# Altium PCB Widora-NEO-SEER.PcbDoc (part 1 of 2)
Units mil, origin at the board's own origin, x right, y up, seen from the top; angles counter-clockwise.
Board outline 3000 x 1400 mil, 4 copper layers (Top Layer, GND, PWR, Bottom Layer), stack 84.8 mil thick; 153 components, 144 nets, 699 pads, 452 vias.
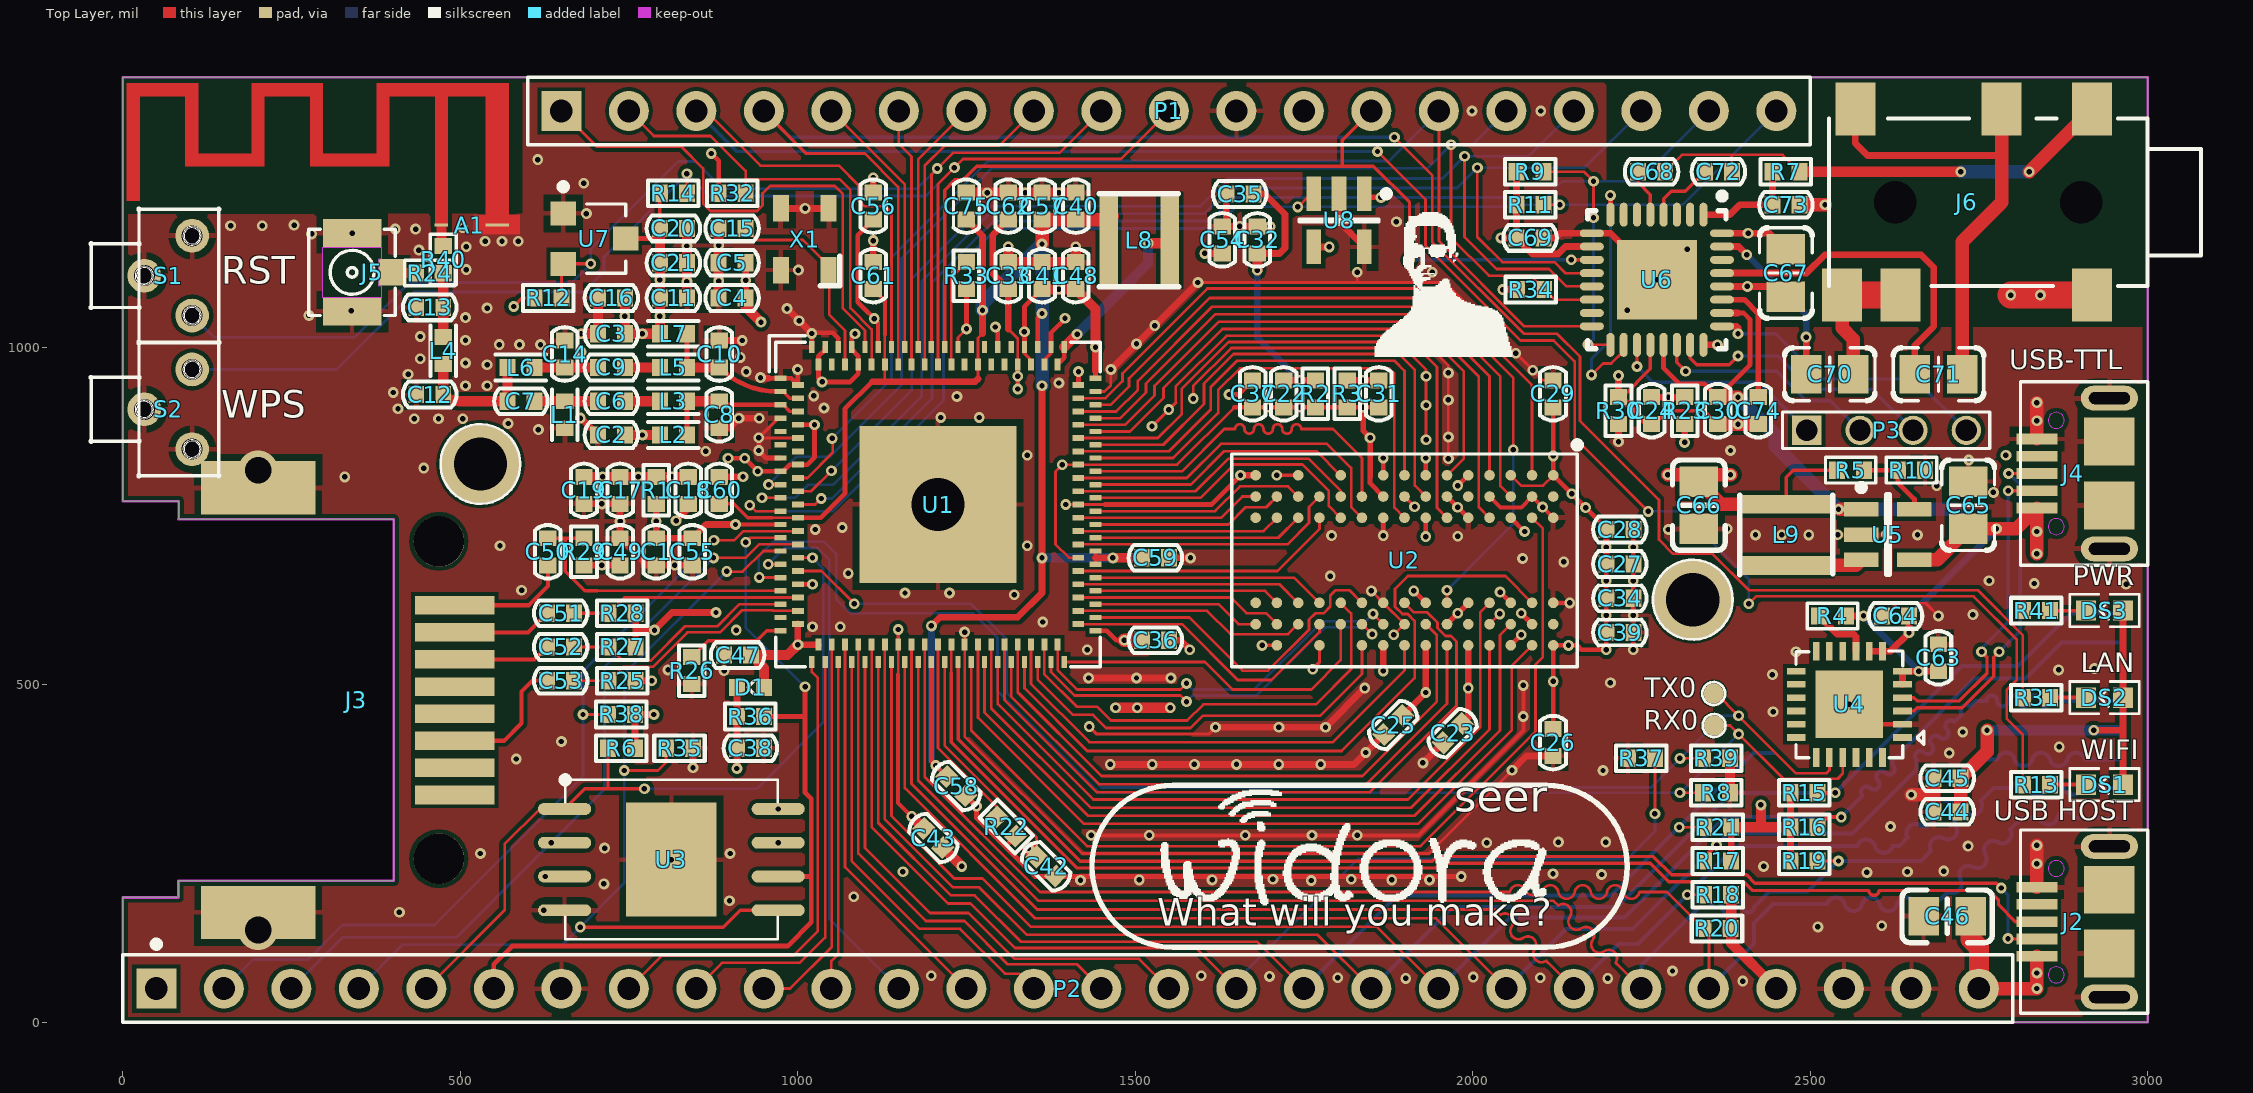
[diagram p0: Top Layer view]
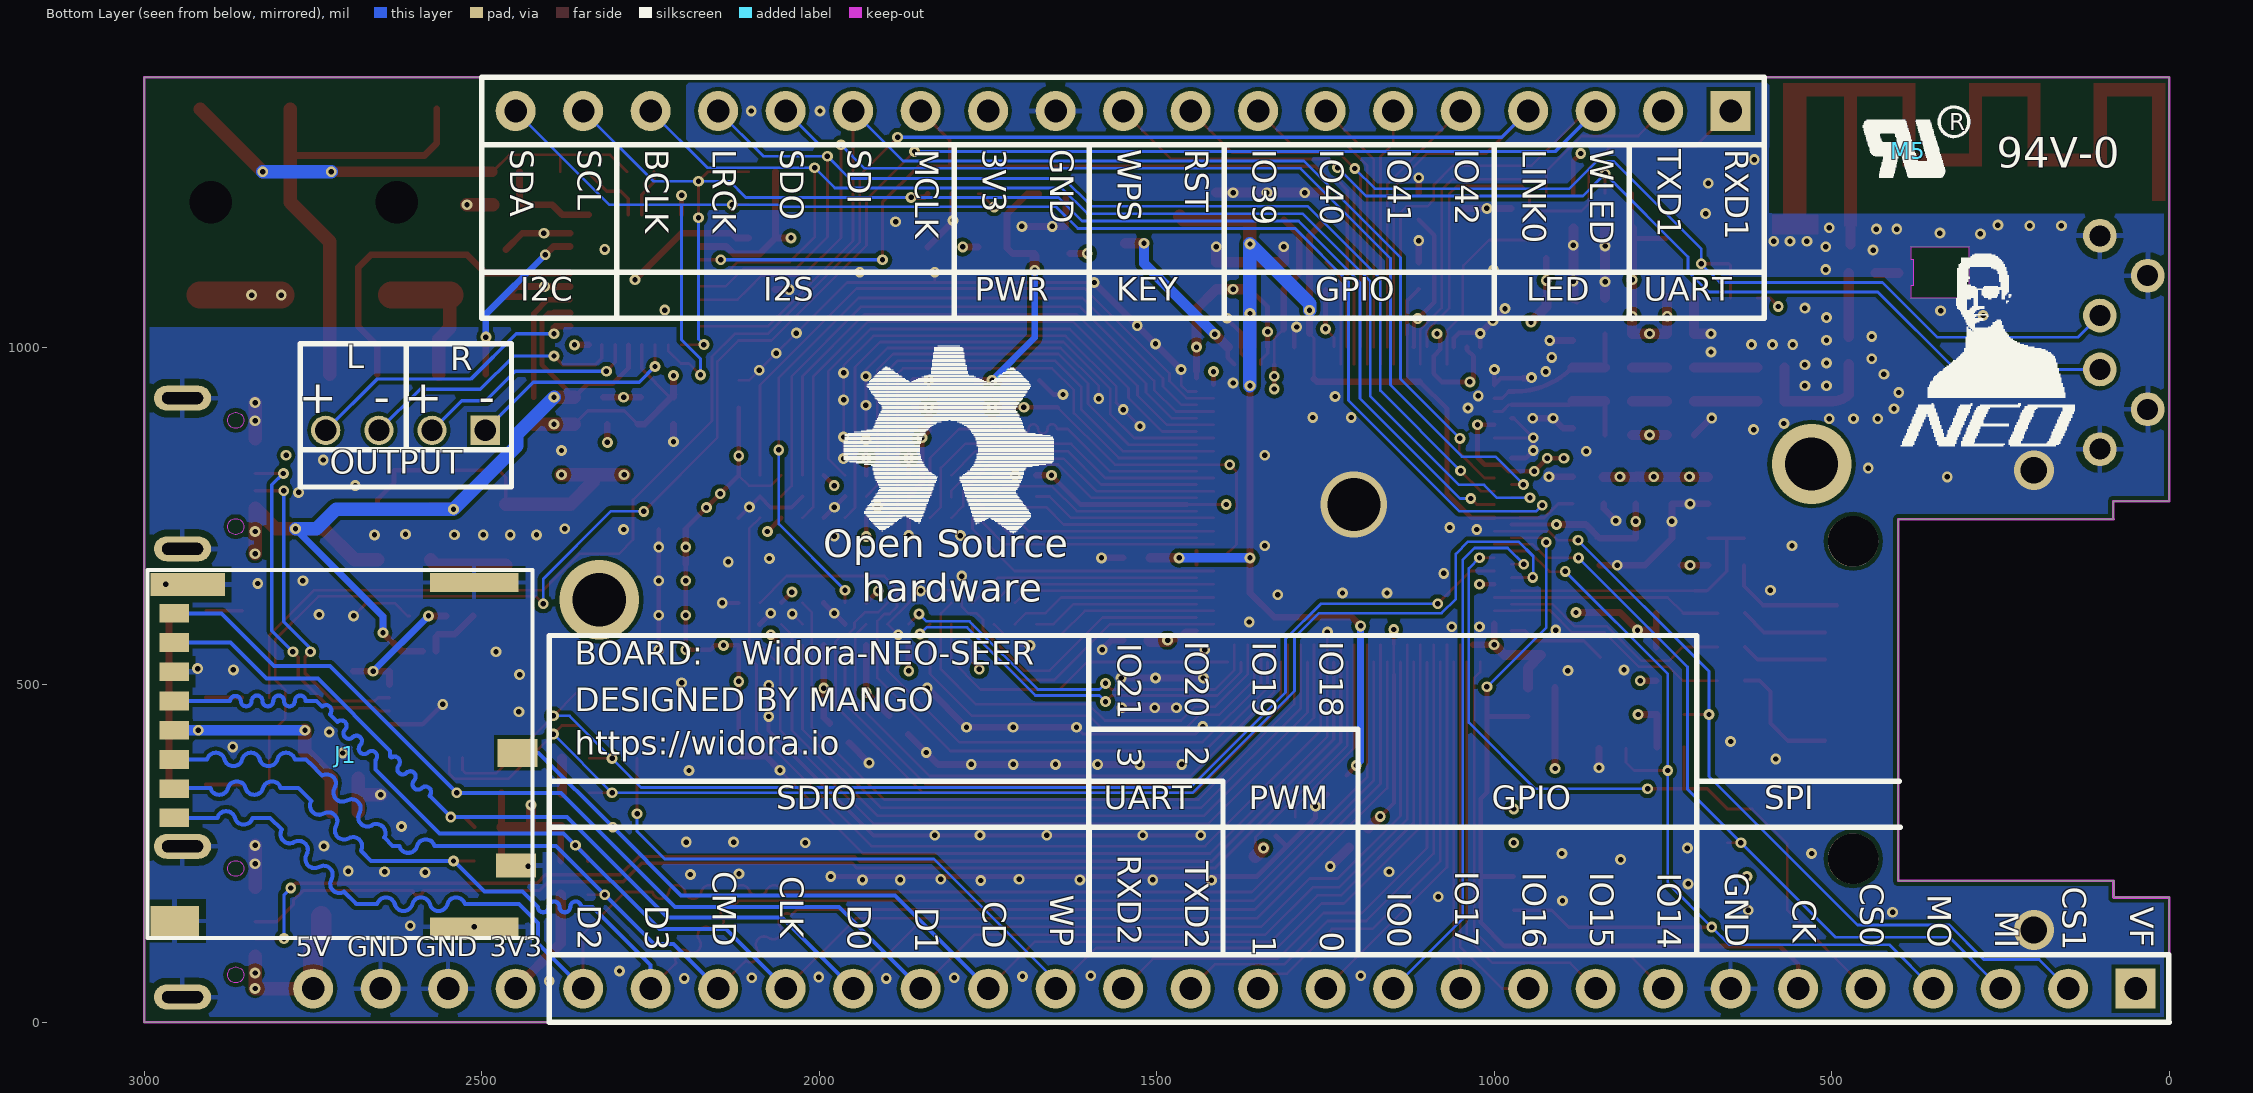
[diagram p1: Bottom Layer view, seen from below]
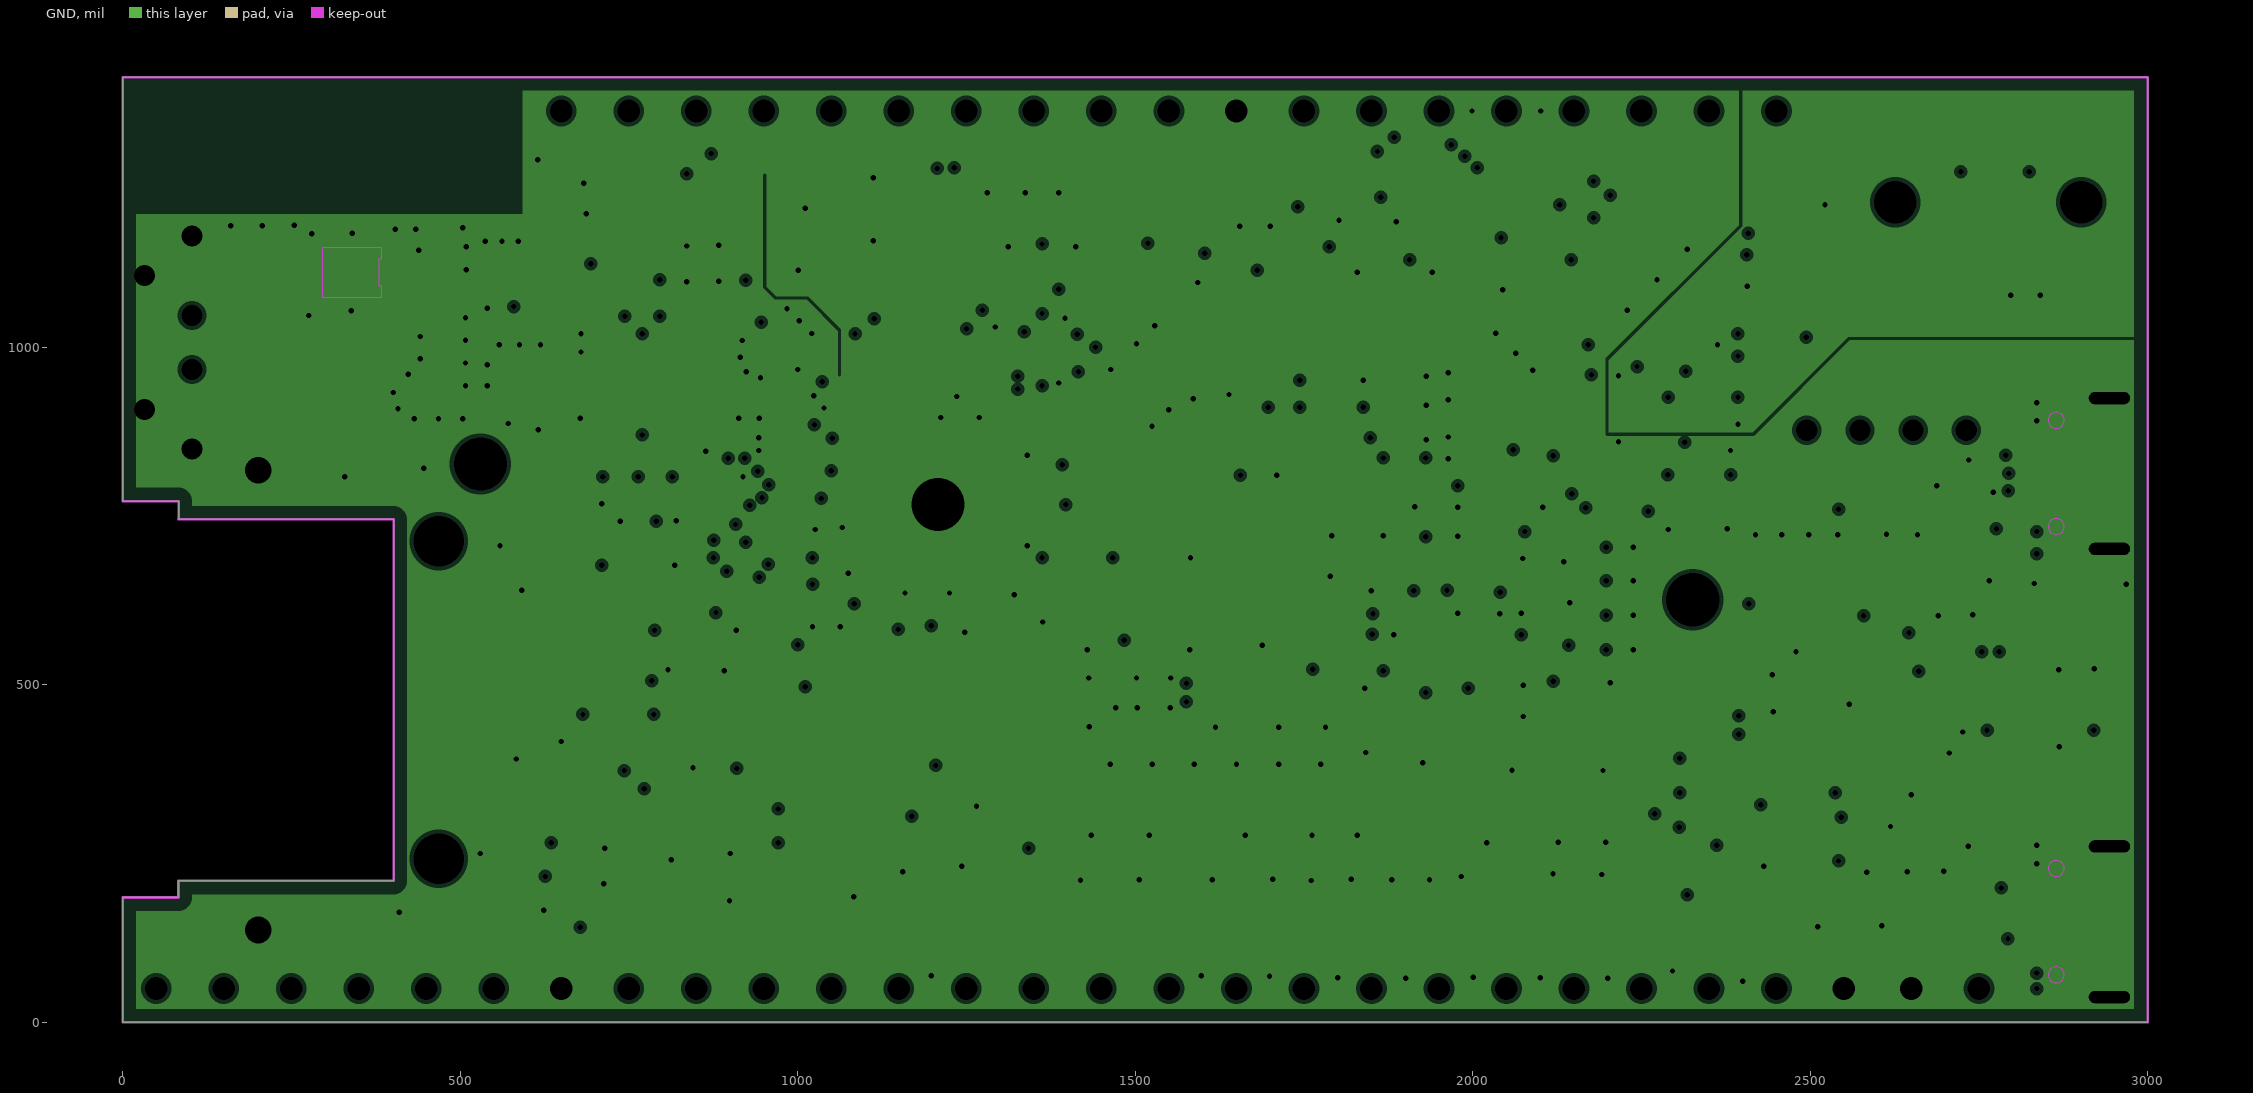
[diagram p2: GND, clearances drawn from the general rule]
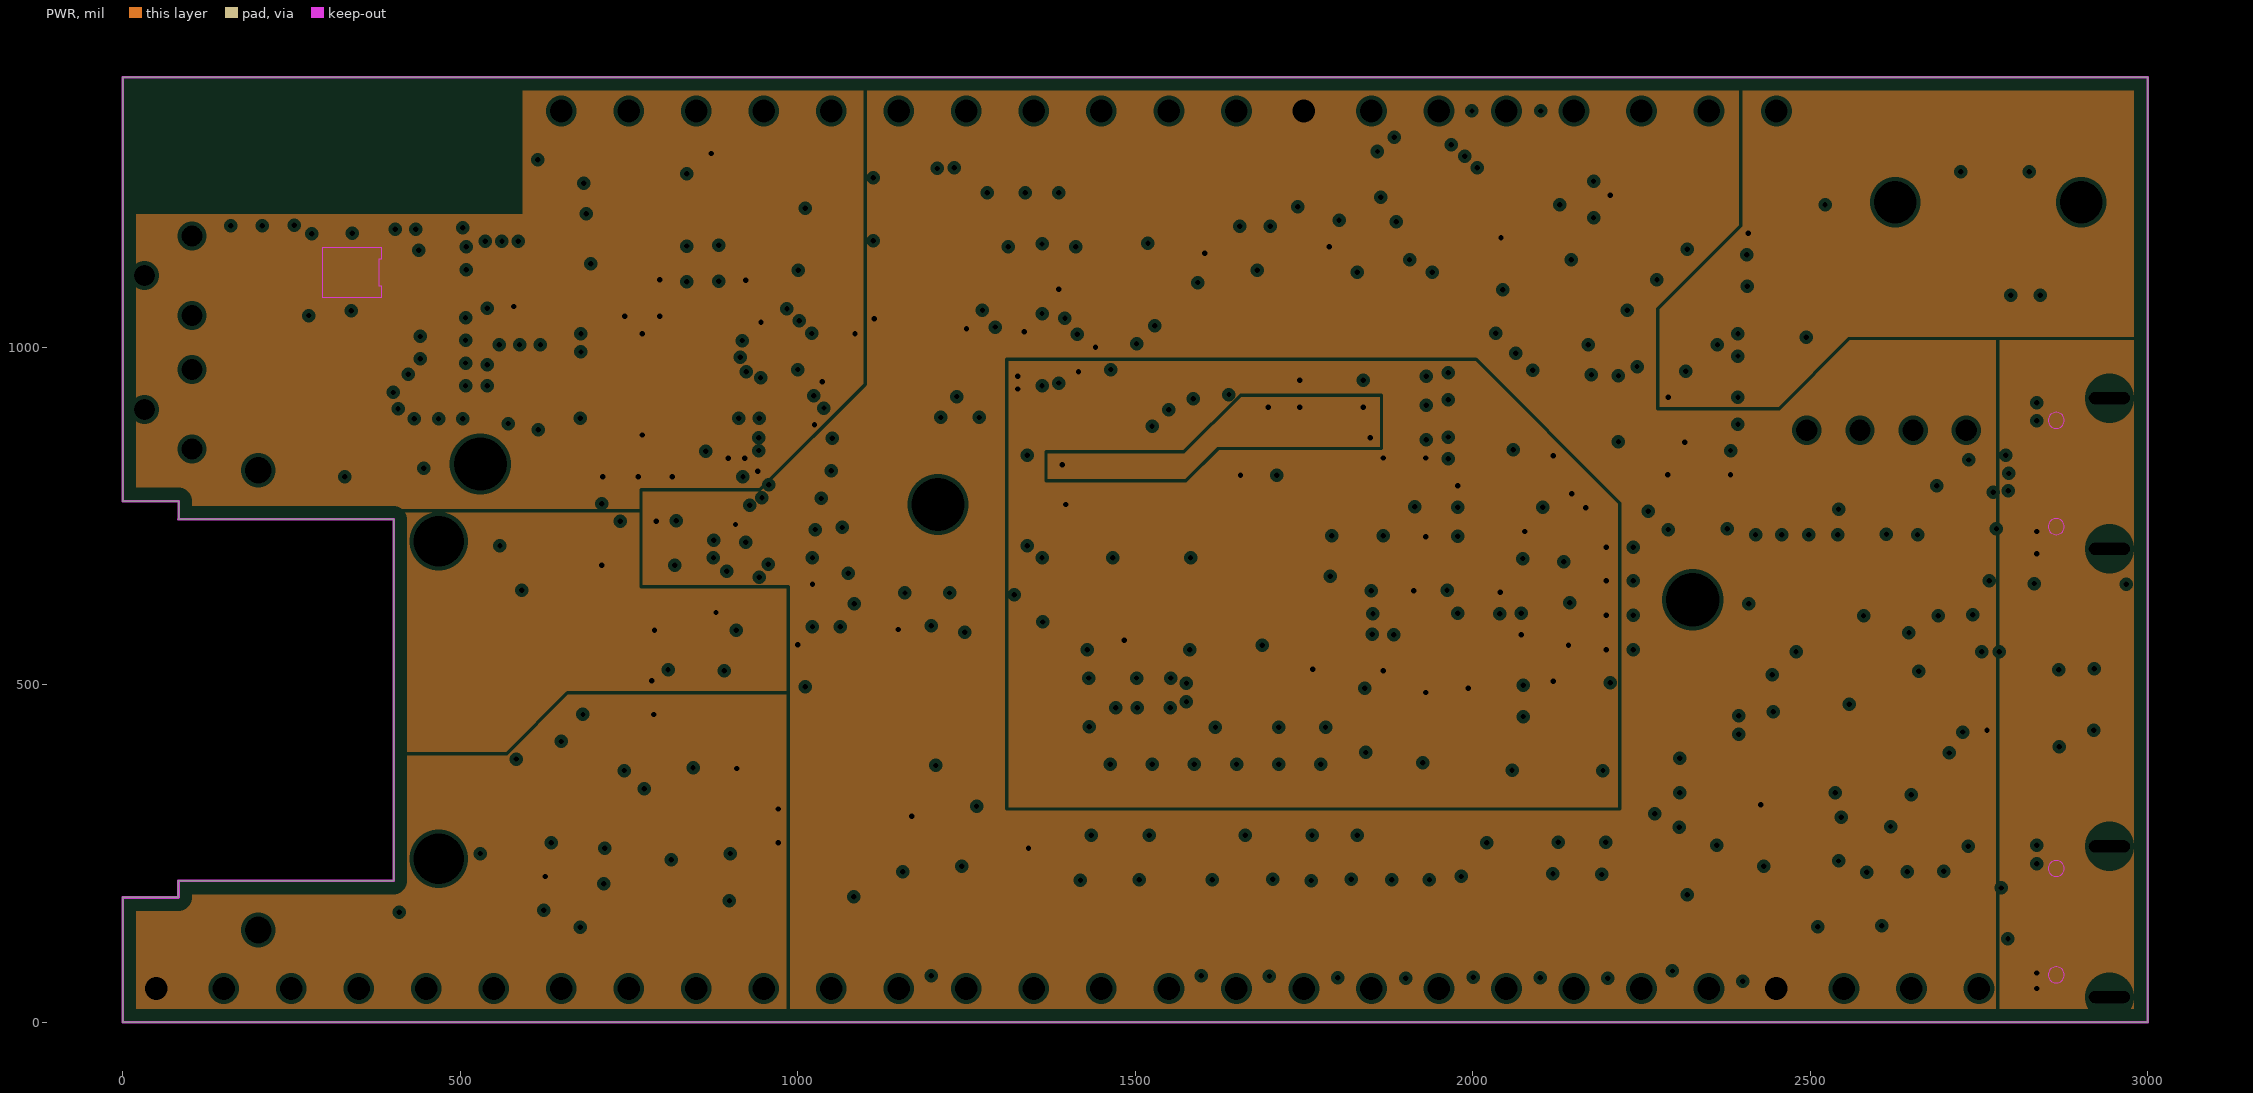
[diagram p3: PWR, clearances drawn from the general rule]
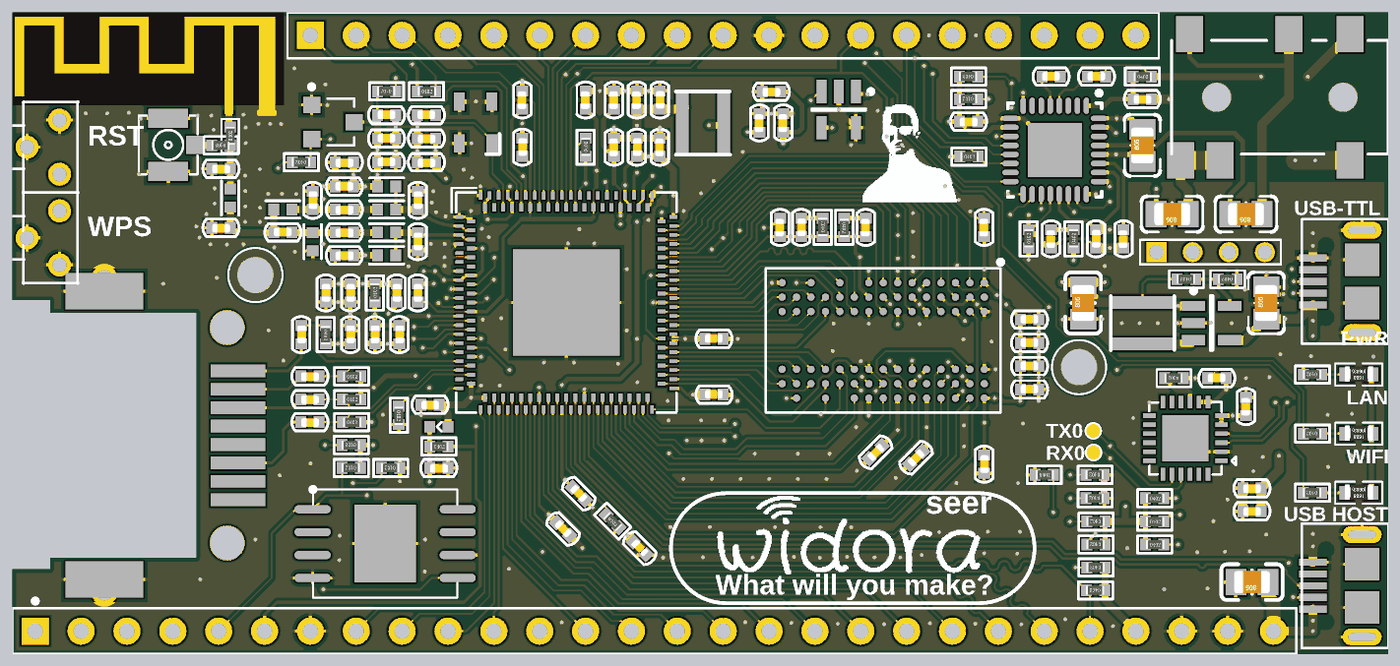
[diagram p5: 3D render of the assembled board from above, using the file's embedded part models]

## Layer stack, top to bottom
Top Solder: solder mask 0.4, Solder Resist, Dk 3.5
Top Layer: signal copper 1.4
Dielectric1: core 54, FR-4, Dk 4.8
GND: plane copper 1.4, net (Multiple Nets)
Dielectric2: prepreg 12.6, FR-4, Dk 4.8
PWR: plane copper 1.4, net (Multiple Nets)
Dielectric3: core 12.6, FR-4, Dk 4.8
Bottom Layer: signal copper 1.4
Bottom Solder: solder mask 0.4, Solder Resist, Dk 3.5

## Board outline
0,1400 3000,1400 3000,0 0,0 0,185 82.68,185 82.68,209.57 401.57,209.57 401.57,745 83,745 83,772 0,772 0,1400

## Design rules (kind name [scope] priority, off if disabled: settings)
Clearance Clearance_Polygon [InPolygon] p1: gap=6
Clearance [All] p2: gap=3.9
ComponentClearance [All] p1 off: gap=1 collisioncheckmode=3 verticalgap=1 showdistances=FALSE
DiffPairsRouting [All] p1: maxlimit=50 minlimit=4 mostfreqgap=5 toplayer_minwidth=4 toplayer_maxwidth=15 toplayer_prefwidth=15 bottomlayer_minwidth=4 bottomlayer_maxwidth=15 bottomlayer_prefwidth=15 maxuncoupledlength=3000
FabricationTestPointUsage TestPointUsage [All] p1 off: valid=0 allowmultiple=FALSE
FabricationTestpoint Testpoint [(IsPad And (OnTopLayer Or OnBottomLayer))] p1 off: side=3 testpointundercomponent=TRUE minsize=40 maxsize=100 preferedsize=60 minholesize=0 maxholesize=40 preferedholesize=32 testpointgrid=1 allowsidetop=TRUE allowsidebottom=TRUE usegrid=TRUE gridtolerance=0.01
HoleSize [All] p1: absolutevalues=TRUE maxlimit=150 minlimit=8 maxpercent=80.000 minpercent=20.000
MinimumSolderMaskSliver [All] p1 off: minsoldermaskwidth=1
PlaneClearance [All] p1: clearance=6
PlaneConnect PlaneConnect_isvia [IsVia] p1: planeconnectstyle=Direct reliefexpansion=20 reliefentries=4 reliefconductorwidth=20 reliefairgap=10
PlaneConnect [All] p2: planeconnectstyle=Direct reliefexpansion=20 reliefentries=4 reliefconductorwidth=25 reliefairgap=10
PolygonConnect PolygonConnect_isvia [All vs IsVia] p1: connectstyle=Direct reliefconductorwidth=10 reliefentries=4 polygonreliefangle="90 Angle" airgapwidth=10
PolygonConnect [All] p2: connectstyle=Relief reliefconductorwidth=7 reliefentries=4 polygonreliefangle="90 Angle" airgapwidth=10
RoutingVias [All] p1: holewidth=8 width=16 viastyle="Through Hole" minholewidth=8 minwidth=16 maxholewidth=150 maxwidth=150
ShortCircuit [InNet('WIFI') vs InNet('GND')] p1: allowed=FALSE
SilkToSilkClearance [All] p1: silktosilkclearance=0
SilkToSolderMaskClearance SilkscreenOverComponentPads [IsPad] p1: minsilkscreentomaskgap=0 clearancetoexposedcopper=TRUE
SolderMaskExpansion [All] p1: expansion=4
Width [All] p1: maxlimit=100 minlimit=4 preferedwidth=5
19 further rules are at their usual default settings.

## Classes and differential pairs
net class MDATA[0..15]: MDATA0 MDATA1 MDATA2 MDATA3 MDATA4 MDATA5 MDATA6 MDATA7 MDATA8 MDATA9 MDATA10 MDATA11 MDATA12 MDATA13 MDATA14 MDATA15
differential pair RXI: +RXI_P -RXI_N
differential pair TXO: +TXO_P -TXO_N
differential pair UD: +UD_P -UD_N
differential pair U: +U_P -U_N
differential pair CLK: +CLK_P -CLK_N

## Components (designator, comment, footprint, x,y, rotation, side; value= is the part's Value field where it differs from the comment)
A1 "WIFI天线 2.4G PCB板载" "2.4G - mirror" 555,1181.02 r0 top locked
C1 "4.7uF" C0402 790.5,697.02 r270 top
C2 "100pF" C0402 724,870.02 r180 top
C3 "100pF" C0402 724,1020.02 r0 top
C4 "100pF" C0402 903,1073.02 r180 top
C5 "100pF" C0402 903,1125.02 r180 top
C6 "10pF" C0402 724,920.02 r180 top
C7 "1.2pF" C0402 590,920 r0 top
C8 "2pF" C0402 884,900 r270 top
C9 "10pF" C0402 724,970.02 r180 top
C10 "2pF" C0402 884,990 r270 top
C11 "100pF" C0402 816,1073.02 r0 top
C12 "1.8pF" C0402 455,930 r180 top
C13 "1.8pF" C0402 455,1059 r180 top
C14 "1.2pF" C0402 655,990 r270 top
C15 "NC" C0402 903,1176.02 r0 top
C16 "100pF" C0402 724,1073.02 r180 top
C17 "4.7uF" C0402 737,788.02 r270 top
C18 "100pF" C0402 838,788.02 r270 top
C19 "100pF" C0402 683.5,788.02 r270 top
C20 "100pF" C0402 816,1176.02 r0 top
C21 "100pF" C0402 816,1125.02 r0 top
C22 "0.1uF" C0402 1720,931.02 r270 top
C23 "4.7uF" C0402 1970.35,428.35 r225 top
C24 "0.1uF" C0402 2265,906 r90 top
C25 "0.1uF" C0402 1882.36,440.36 r225 top
C26 "0.1uF" C0402 2119,414.36 r270 top
C27 "0.1uF" C0402 2218,678.86 r0 top
C28 "0.1uF" C0402 2218,730 r0 top
C29 "0.1uF" C0402 2119,931 r90 top
C30 "0.1uF" C0402 2363,906 r270 top
C31 "0.1uF" C0402 1861,931.02 r90 top
C32 "100pF" C0402 1680.98,1159 r90 top
C33 "4.7uF" C0402 1312,1106.02 r90 top
C34 "0.1uF" C0402 2218,628.14 r0 top
C35 "0.1uF" C0402 1655,1227 r180 top
C36 "100pF" C0402 1530,566 r0 top
C37 "0.1uF" C0402 1674,931 r90 top
C38 "0.1uF" C0402 930,406 r180 top
C39 "0.1uF" C0402 2218,577.43 r0 top
C40 "4.7uF" C0402 1412,1209 r270 top
C41 "4.7uF" C0402 1362,1106.02 r270 top
C42 "4.7uF" C0402 1368,231 r315 top
C43 "0.1uF" C0402 1201,273 r315 top
C44 "0.1uF" C0402 2703,311.68 r180 top
C45 "4.7uF" C0402 2703,361.68 r180 top
C46 "10uF" 0805C 2703,157 r180 top
C47 "4.7uF" C0402 911,544 r180 top
C48 "0.1uF" C0402 1412,1106.02 r90 top
C49 "0.1uF" C0402 737,697.02 r270 top
C50 "0.1uF" C0402 630,697.02 r270 top
C51 "0.1uF" C0402 649,606.02 r180 top
C52 "0.1uF" C0402 649,556.02 r180 top
C53 "0.1uF" C0402 649,506.02 r180 top
C54 "4.7uF" C0402 1628.98,1159 r90 top
C55 "4.7uF" C0402 844,697.02 r270 top
C56 "0.1uF" C0402 1112,1209.02 r90 top
C57 "4.7uF" C0402 1362,1209.02 r90 top
C58 "0.1uF" C0402 1235,350 r315 top
C59 "0.1uF" C0402 1530,688 r0 top
C60 "100pF" C0402 884,788.02 r270 top
C61 "100pF" C0402 1112,1106.02 r270 top
C62 "4.7uF" C0402 1312,1209.02 r90 top
C63 "4.7uF" C0402 2690,540 r90 top
C64 "4.7uF" C0402 2626.37,602 r0 top
C65 "47uF" 0805C 2734,766 r90 top
C66 "47uF" 0805C 2335,766 r90 top
C67 "47uF" 0805C 2464,1110 r90 top
C68 "4.7uF" C0402 2265,1260 r0 top
C69 "0.1uF" C0402 2085,1162 r180 top
C70 "47uF" 0805C 2529,960 r180 top
C71 "47uF" 0805C 2690,960 r180 top
C72 "4.7uF" C0402 2364,1260 r0 top
C73 "4.7uF" C0402 2464,1211 r180 top
C74 "4.7uF" C0402 2423,906 r90 top
C75 "0.1uF" C0402 1249.98,1209.02 r90 top
D1 "Diode" SOD723 930,496 r180 top
DS1 "YELLOW LED 0603" LED0603 2936,352 r180 top
DS2 "BLUE LED 0603" LED0603 2936,480.95 r180 top
DS3 "RED LED 0603" LED0603 2936,609.91 r180 top
J1 "TF5033981892" TFCARD 2955,150 r90 bottom locked
J2 "MICRO_USB" MICROUSB 2906,149 r90 top locked
J3 "RJ45" RJ45 492.13,477.28 r270 top locked
J4 "MK5P microUSB" MICROUSB 2906,813 r90 top locked
J5 "ipex" IPEX 340,1111 r90 top locked
J6 "PJ-311D" PJ311D 3000,1215 r180 top locked
L1 "2.7nH" L0402 655,900 r90 top
L2 "10nH" L0402 816,870.02 r180 top
L3 "2nH" L0402 816,920.02 r0 top
L4 "2nH" L0402 475,995 r270 top
L5 "2nH" L0402 816,970.02 r0 top
L6 "2.7nH" L0402 590,970 r0 top
L7 "10nH" L0402 816,1020.02 r0 top
L8 "3.3uH" VLS3012E 1506,1159 r180 top
L9 "3.3uH" VLS3012E 2465,722 r90 top
M5 "mark" ZY_UR-3X2 387,1291 r180 bottom
P1 "19PIN 2.54mm单排针" HDR1X19 650,1350 r0 top locked
P2 "Header 28" HDR1X28 50,50 r0 top locked
P3 "Header 4" "HDR1X4 -2.0" 2495,877 r0 top
R1 "0R" R0402 790.5,788.02 r90 top
R2 "2K2" R0402 1767,931.02 r90 top
R3 "2K2" R0402 1814,931.02 r270 top
R4 "5.1K" R0402 2533,602 r180 top
R5 "10K" R0402 2560,818 r180 top
R6 "5.1K" R0402 739,406 r180 top
R7 "2K2" R0402 2464,1260 r0 top
R8 "5.1K" R0402 2361,340 r180 top
R9 "5.1K" R0402 2085,1260 r180 top
R10 "2K2" R0402 2650,818 r180 top
R11 "5.1K" R0402 2085,1211 r180 top
R12 "5.1K" R0402 630.32,1073.02 r180 top
R13 "5.1K" R0402 2835,352 r180 top
R14 "5.1K" R0402 816,1228 r180 top
R15 "10K" R0402 2491,340 r0 top
R16 "10K" R0402 2491,289 r0 top
R17 "10K" R0402 2363,239 r180 top
R18 "10K" R0402 2363,189 r180 top
R19 "10K" R0402 2491,239 r0 top
R20 "10K" R0402 2361.95,139 r180 top
R21 "10K" R0402 2363,289 r180 top
R22 "5.1K" R0402 1309,290 r315 top
R23 "0R" R0402 2314,906 r90 top
R24 "NC" R0402 455,1110 r180 top (schematic designator R?)
R25 "50R" R0402 740,506.02 r0 top
R26 "24.3K 1%" R0402 843,521 r270 top
R27 "50R" R0402 740,556.02 r0 top
R28 "50R" R0402 740,606.02 r0 top
R29 "50R" R0402 683.5,697.02 r270 top
R30 "0R" R0402 2216,906 r90 top
R31 "5.1K" R0402 2835,480.95 r180 top
R32 "5.1K" R0402 903,1228 r0 top
R33 "5.1K" R0402 1250,1106.02 r90 top
R34 "5.1K" R0402 2086,1085.47 r0 top
R35 "5.1K" R0402 825,406 r180 top
R36 "5.1K" R0402 930,453 r0 top
R37 "5.1K" R0402 2250,391 r0 top
R38 "5.1K" R0402 739,456 r180 top
R39 "5.1K" R0402 2361,391 r180 top
R40 "0R" R0402 475,1130 r90 top
R41 "5.1K" R0402 2835,609.91 r180 top
RX0 "TEST POINT" TEST-POINT 2357.64,439.64 r270 top
S1 "SW-CE" KEY-A06 103,1047 r270 top
S2 "SW-CE" KEY-A06 103,849 r270 top
TX0 "TEST POINT" TEST-POINT 2357,487 r90 top
U1 "MT7688AN" MT7628AN/DRQFN156/SMD/P0.5/12X12 1208,767.02 r270 top locked
U2 "W971GG6KB-25" FBGA84-small 1899,684.35 r270 top locked
U3 "W25Q256 WSON封装" WSON-SPIFLASH 813,241 r0 top locked
U4 "CP2104" QFN24 2558,471 r180 top
U5 "SY8008" SOT23-5 2615,722.37 r0 top locked
U6 "WM8960GEFL/RV" QFN50P500X500X100-33N 2273,1100 r270 top locked
U7 "MAX809" SOT23 699,1161 r270 top locked
U8 "24LC02B" SOT23-5 1802,1188 r270 top
X1 "40MHz,3225封装无源晶振" XTAL3225 1011,1160.02 r270 top

## Footprints (in the part's own frame and the unit in brackets; to place one, negate y for a bottom-side part, rotate by r counter-clockwise, add the part's x,y. Pads: shape width x height; smd on the part's side, far side on the other; paste and mask are expansions set on the pad)
"2.4G - mirror" [mil]
  rect 20x5 smd paste-39.37: 1(-82.68,0)
  rect 35.43x5 smd paste-39.37: 2(0,0)
  Top Layer region: 17.72,192.38 -17.72,192.38 -17.72,-2.5 17.72,-2.5
  Top Layer region: -72.83,192.38 -92.52,192.38 -92.52,-2.5 -72.83,-2.5
  Top Layer region: -529.53,192.38 -549.21,192.38 -549.21,35.29 -529.53,35.29
  Top Layer region: -442.91,210.13 -549.21,210.13 -549.21,190.44 -442.91,190.44
  Top Layer region: -442.91,192.38 -462.6,192.38 -462.6,86.48 -442.91,86.48
  Top Layer region: -362.2,106.16 -444.88,106.16 -444.88,86.48 -362.2,86.48
  Top Layer region: -344.49,192.38 -364.17,192.38 -364.17,86.48 -344.49,86.48
  Top Layer region: -257.87,210.13 -364.17,210.13 -364.17,190.44 -257.87,190.44
  Top Layer region: -257.87,192.38 -277.56,192.38 -277.56,86.48 -257.87,86.48
  Top Layer region: -177.16,106.19 -259.84,106.19 -259.84,86.5 -177.16,86.5
  Top Layer region: -159.45,192.38 -179.13,192.38 -179.13,86.48 -159.45,86.48
  Top Layer region: 17.74,210.09 -179.11,210.09 -179.11,190.41 17.74,190.41
0805C [mm]
  rect 1.15x1.45 smd: 1(-0.889,0) 2(0.889,0)
  silkscreen extent -1.7,-0.99 1.7,0.99, body extent -1,-0.63 1,0.63, height 0.78
C0402 [mm]
  rect 0.6x0.65 smd: 1(-0.508,0) 2(0.508,0)
  silkscreen extent -1.01,-0.48 1.01,0.48, body extent -0.51,-0.23 0.49,0.27, height 0.5
FBGA84-small [mm]
  round 0.4 smd: A1(-3.2,5.6) A2(-2.4,5.6) A3(-1.6,5.6) A7(1.6,5.6) A8(2.4,5.6) A9(3.2,5.6) B1(-3.2,4.8) B2(-2.4,4.8) B3(-1.6,4.8) B7(1.6,4.8) B8(2.4,4.8) B9(3.2,4.8) C1(-3.2,4) C2(-2.4,4) C3(-1.6,4) C7(1.6,4) C8(2.4,4) C9(3.2,4) D1(-3.2,3.2) D2(-2.4,3.2) D3(-1.6,3.2) D7(1.6,3.2) D8(2.4,3.2) D9(3.2,3.2) E1(-3.2,2.4) E2(-2.4,2.4) E3(-1.6,2.4) E7(1.6,2.4) E8(2.4,2.4) E9(3.2,2.4) F1(-3.2,1.6) F2(-2.4,1.6) F3(-1.6,1.6) F7(1.6,1.6) F8(2.4,1.6) F9(3.2,1.6) G1(-3.2,0.8) G2(-2.4,0.8) G3(-1.6,0.8) G7(1.6,0.8) G8(2.4,0.8) G9(3.2,0.8) H1(-3.2,0) H2(-2.4,0) H3(-1.6,0) H7(1.6,0) H8(2.4,0) H9(3.2,0) J1(-3.2,-0.8) J2(-2.4,-0.8) J3(-1.6,-0.8) J7(1.6,-0.8) J8(2.4,-0.8) J9(3.2,-0.8) K2(-2.4,-1.6) K3(-1.6,-1.6) K7(1.6,-1.6) K8(2.4,-1.6) K9(3.2,-1.6) L1(-3.2,-2.4) L2(-2.4,-2.4) L3(-1.6,-2.4) L7(1.6,-2.4) L8(2.4,-2.4) M2(-2.4,-3.2) M3(-1.6,-3.2) M7(1.6,-3.2) M8(2.4,-3.2) M9(3.2,-3.2) N1(-3.2,-4) N2(-2.4,-4) N3(-1.6,-4) N7(1.6,-4) N8(2.4,-4) P2(-2.4,-4.8) P3(-1.6,-4.8) P7(1.6,-4.8) P8(2.4,-4.8) P9(3.2,-4.8) R1(-3.2,-5.6) R2(-2.4,-5.6) R3(-1.6,-5.6) R7(1.6,-5.6) R8(2.4,-5.6)
  silkscreen extent -4.47,-6.5 4,6.63
"HDR1X4 -2.0" [mm]
  rect 1.1x1.1 hole 0.8: 1(0,0)
  round 1.1 hole 0.8: 2(2,0) 3(4,0) 4(6,0)
  silkscreen extent -0.91,-0.69 6.88,0.69
HDR1X19 [mm]
  rect 1.5x1.5 hole 0.85: 1(0,0)
  round 1.5 hole 0.85: 2(2.54,0) 3(5.08,0) 4(7.62,0) 5(10.16,0) 6(12.7,0) 7(15.24,0) 8(17.78,0) 9(20.32,0) 10(22.86,0) 11(25.4,0) 12(27.94,0) 13(30.48,0) 14(33.02,0) 15(35.56,0) 16(38.1,0) 17(40.64,0) 18(43.18,0) 19(45.72,0)
  silkscreen extent -1.27,-1.27 46.99,1.27
HDR1X28 [mm]
  rect 1.5x1.5 hole 0.85: 1(0,0)
  round 1.5 hole 0.85: 2(2.54,0) 3(5.08,0) 4(7.62,0) 5(10.16,0) 6(12.7,0) 7(15.24,0) 8(17.78,0) 9(20.32,0) 10(22.86,0) 11(25.4,0) 12(27.94,0) 13(30.48,0) 14(33.02,0) 15(35.56,0) 16(38.1,0) 17(40.64,0) 18(43.18,0) 19(45.72,0) 20(48.26,0) 21(50.8,0) 22(53.34,0) 23(55.88,0) 24(58.42,0) 25(60.96,0) 26(63.5,0) 27(66.04,0) 28(68.58,0)
  silkscreen extent -1.27,-1.27 69.85,1.79
IPEX [mm]
  rect 1x1.05 smd: 1(0,-1.525)
  rect 1.05x2.2 smd: 2(-1.475,0) 3(1.475,0)
  Keep-Out Layer pour cut-out: -0.95,1.1 0.95,1.1 0.95,-1.1 0.5,-1.1 0.5,-1 -0.5,-1 -0.5,-1.1 -0.95,-1.1
  silkscreen extent -1.63,-1.63 1.63,1.63
KEY-A06 [mil]
  round 50 hole 31: 0(-59.05,-70.87) 1(0,0) 2(-118.11,0)
  silkscreen extent -159,-152 41,41
L0402 [mm]
  rect 0.6x0.65 smd: 1(-0.508,0) 2(0.508,0)
  silkscreen extent -0.95,-0.48 0.95,0.48
LED0603 [mil]
  rect 30x30 smd: A(-27.5,0) K(27.5,0)
  silkscreen extent -52,-24 52,24, body extent -31,-18 30,16, height 18
MICROUSB [mil] "MICROUSB"
  rect 15.75x60.31 smd: 1(-51.17,70.09) 2(-25.58,70.09) 3(0.01,70.09) 4(25.6,70.09) 5(51.19,70.09)
  oval 37x84.65 hole 17.72 slot 61.02 at 90 deg: 6(-111.6,-37.26) 7(111.62,-37.26)
  rect 70.87x74.8 smd: 8(-47.23,-37.26) 9(47.25,-37.26)
  Keep-Out Layer lines w1: -78.73,53.29 cw(c-78.73,41.48) -78.73,29.67 cw(c-78.73,41.48) -78.73,53.29 ; 78.75,53.29 cw(c78.75,41.48) 78.75,29.67 cw(c78.75,41.48) 78.75,53.29
  silkscreen extent -136,-94 136,94
MT7628AN/DRQFN156/SMD/P0.5/12X12 [mm] "官方封装"
  rect 0.2x0.45 smd: 1(-4.75,-5.925) 3(-4.25,-5.925) 5(-3.75,-5.925) 7(-3.25,-5.925) 9(-2.75,-5.925) 11(-2.25,-5.925) 13(-1.75,-5.925) 15(-1.25,-5.925) 17(-0.75,-5.925) 19(-0.25,-5.925) 21(0.25,-5.925) 23(0.75,-5.925) 25(1.25,-5.925) 27(1.75,-5.925) 29(2.25,-5.925) 31(2.75,-5.925) 33(3.25,-5.925) 35(3.75,-5.925) 37(4.25,-5.925) 39(4.75,-5.925) 79(4.75,5.925) 81(4.25,5.925) 83(3.75,5.925) 85(3.25,5.925) 87(2.75,5.925) 89(2.25,5.925) 91(1.75,5.925) 93(1.25,5.925) 95(0.75,5.925) 97(0.25,5.925) 99(-0.25,5.925) 101(-0.75,5.925) 103(-1.25,5.925) 105(-1.75,5.925) 107(-2.25,5.925) 109(-2.75,5.925) 111(-3.25,5.925) 113(-3.75,5.925) 115(-4.25,5.925) 117(-4.75,5.925)
  rect 0.22x0.45 smd: 2(-4.5,-5.275) 4(-4,-5.275) 6(-3.5,-5.275) 8(-3,-5.275) 10(-2.5,-5.275) 12(-2,-5.275) 14(-1.5,-5.275) 16(-1,-5.275) 18(-0.5,-5.275) 20(0,-5.275) 22(0.5,-5.275) 24(1,-5.275) 26(1.5,-5.275) 28(2,-5.275) 30(2.5,-5.275) 32(3,-5.275) 34(3.5,-5.275) 36(4,-5.275) 38(4.5,-5.275) 80(4.5,5.275) 82(4,5.275) 84(3.5,5.275) 86(3,5.275) 88(2.5,5.275) 90(2,5.275) 92(1.5,5.275) 94(1,5.275) 96(0.5,5.275) 98(0,5.275) 100(-0.5,5.275) 102(-1,5.275) 104(-1.5,5.275) 106(-2,5.275) 108(-2.5,5.275) 110(-3,5.275) 112(-3.5,5.275) 114(-4,5.275) 116(-4.5,5.275)
  rect 0.45x0.2 smd: 40(5.925,-4.75) 42(5.925,-4.25) 44(5.925,-3.75) 46(5.925,-3.25) 48(5.925,-2.75) 50(5.925,-2.25) 52(5.925,-1.75) 54(5.925,-1.25) 56(5.925,-0.75) 58(5.925,-0.25) 60(5.925,0.25) 62(5.925,0.75) 64(5.925,1.25) 66(5.925,1.75) 68(5.925,2.25) 70(5.925,2.75) 72(5.925,3.25) 74(5.925,3.75) 76(5.925,4.25) 78(5.925,4.75) 118(-5.925,4.75) 120(-5.925,4.25) 122(-5.925,3.75) 124(-5.925,3.25) 126(-5.925,2.75) 128(-5.925,2.25) 130(-5.925,1.75) 132(-5.925,1.25) 134(-5.925,0.75) 136(-5.925,0.25) 138(-5.925,-0.25) 140(-5.925,-0.75) 142(-5.925,-1.25) 144(-5.925,-1.75) 146(-5.925,-2.25) 148(-5.925,-2.75) 150(-5.925,-3.25) 152(-5.925,-3.75) 154(-5.925,-4.25) 156(-5.925,-4.75)
  rect 0.45x0.22 smd: 41(5.275,-4.5) 43(5.275,-4) 45(5.275,-3.5) 47(5.275,-3) 49(5.275,-2.5) 51(5.275,-2) 53(5.275,-1.5) 55(5.275,-1) 57(5.275,-0.5) 59(5.275,0) 61(5.275,0.5) 63(5.275,1) 65(5.275,1.5) 67(5.275,2) 69(5.275,2.5) 71(5.275,3) 73(5.275,3.5) 75(5.275,4) 77(5.275,4.5) 119(-5.275,4.5) 121(-5.275,4) 123(-5.275,3.5) 125(-5.275,3) 127(-5.275,2.5) 129(-5.275,2) 131(-5.275,1.5) 133(-5.275,1) 135(-5.275,0.5) 137(-5.275,0) 139(-5.275,-0.5) 141(-5.275,-1) 143(-5.275,-1.5) 145(-5.275,-2) 147(-5.275,-2.5) 149(-5.275,-3) 151(-5.275,-3.5) 153(-5.275,-4) 155(-5.275,-4.5)
  rect 5.9x5.9 smd: 157(0,0)
  silkscreen extent -6.35,-6.35 6.1,6.1
PJ311D [mm] "PJ-311D"
  rect 1.5x2 smd: 1(2.1,-3.5) 2(2.1,3.5) 3(5.5,-3.5) 4(9.3,3.5) 5(11.5,3.5) 6(11,-3.5)
  round 1 hole 1.6: ""(2.5,0) ""(9.5,0)
  silkscreen extent -2,-3.15 12,3.15
QFN24 [mm]
  rect 0.7x0.25 smd: 1(-2,1.25) 2(-2,0.75) 3(-2,0.25) 4(-2,-0.25) 5(-2,-0.75) 6(-2,-1.25) 13(2,-1.25) 14(2,-0.75) 15(2,-0.25) 16(2,0.25) 17(2,0.75) 18(2,1.25)
  rect 0.25x0.7 smd: 7(-1.25,-2) 8(-0.75,-2) 9(-0.25,-2) 10(0.25,-2) 11(0.75,-2) 12(1.25,-2) 19(1.25,2) 20(0.75,2) 21(0.25,2) 22(-0.25,2) 23(-0.75,2) 24(-1.25,2)
  rect 2.55x2.55 smd: 25(0,0)
  silkscreen extent -2.79,-2.01 2.01,2.01
QFN50P500X500X100-33N [mm]
  oval 0.9x0.3 smd: 1(-2.45,1.75) 2(-2.45,1.25) 3(-2.45,0.75) 4(-2.45,0.25) 5(-2.45,-0.25) 6(-2.45,-0.75) 7(-2.45,-1.25) 8(-2.45,-1.75) 17(2.45,-1.75) 18(2.45,-1.25) 19(2.45,-0.75) 20(2.45,-0.25) 21(2.45,0.25) 22(2.45,0.75) 23(2.45,1.25) 24(2.45,1.75)
  oval 0.3x0.9 smd: 9(-1.75,-2.45) 10(-1.25,-2.45) 11(-0.75,-2.45) 12(-0.25,-2.45) 13(0.25,-2.45) 14(0.75,-2.45) 15(1.25,-2.45) 16(1.75,-2.45) 25(1.75,2.45) 26(1.25,2.45) 27(0.75,2.45) 28(0.25,2.45) 29(-0.25,2.45) 30(-0.75,2.45) 31(-1.25,2.45) 32(-1.75,2.45)
  rect 3x3 smd: 33(0,0)
  silkscreen extent -3.27,-2.6 2.6,2.6
R0402 [mm]
  rect 0.6x0.65 smd: 1(-0.508,0) 2(0.508,0)
  silkscreen extent -0.95,-0.48 0.95,0.48, body extent -0.47,-0.25 0.53,0.25, height 0.35
RJ45 [mm] "RJ45接口不带变压器"
  rect 0.7x3 smd: 1(-3.57,0) 2(-2.55,0) 3(-1.53,0) 4(-0.51,0) 5(0.51,0) 6(1.53,0) 7(2.55,0) 8(3.57,0)
  rect 2x4.3 smd: 9(-7.99,-7.4) 10(7.99,-7.4)
  round 1.9 hole 1.9: ""(-5.97,-0.6) ""(5.97,-0.6)
  Keep-Out Layer lines w0.1: 6.8,-10.4 6.8,-2.3 -6.8,-2.3 -6.8,-10.4
SOD723 [mm]
  rect 0.6x0.65 smd: A(-0.508,0) K(0.508,0)
  silkscreen extent -0.15,-0.25 0.1,0.25
SOT23 [mm] "SOT-23; 3 Leads; Body 3.0 x 2.5 mm, inc. leads (LxW max)"
  rect 0.9x0.95 smd: 1(-0.95,-1.175) 2(0.95,-1.175) 3(0,1.175)
  silkscreen extent -2.07,-1.3 1.3,1.18
SOT23-5 [mm] "SOT23, 5-Leads, Body 3.0x2.6mm (max), Pitch 0.95mm, IPC Medium Density"
  rect 1.3x0.55 smd: 1(-1,0.95) 2(-1,0) 3(-1,-0.95) 4(1,-0.95) 5(1,0.95)
  silkscreen extent -1.12,-1.5 0.05,1.9, body extent -0.7,-1.5 0.7,1.5, height 1.1
TEST-POINT [mil]
  round 30 smd paste-15.75: 1(0,0)
  silkscreen extent -17,-17 17,17
TFCARD [mm] "TFCARD"
  rect 0.7x1.1 smd: 1(3.88,0.015) 2(4.98,0.015) 3(6.08,0.015) 4(7.18,0.015) 5(8.28,0.015) 6(9.38,0.015) 7(10.48,0.015) 8(11.58,0.015)
  rect 1.14x1.83 smd: G1(0,0)
  rect 0.86x2.8 smd: G2(12.66,-0.485)
  rect 0.7x3.33 smd: G3(-0.22,-11.265) G4(12.74,-11.265)
  rect 0.9x1.5 smd: G5(2.09,-12.846)
  rect 1.05x1.5 smd: G6(6.33,-12.906)
  silkscreen extent -0.64,-13.46 13.21,1.02
VLS3012E [mil] "VLS3012E"
  rect 27.56x131.1 smd: 1(45.28,0.5) 2(-45.28,0.5)
  silkscreen extent -59,-68 59,70
WSON-SPIFLASH [mm]
  oval 2x0.45 smd: 1(-4.018,1.905) 2(-4.018,0.635) 3(-4.018,-0.635) 4(-4.018,-1.905) 5(4.018,-1.905) 6(4.018,-0.635) 7(4.018,0.635) 8(4.018,1.905)
  rect 3.4x4.3 smd: 4(0,0)
  silkscreen extent -4.12,-3 4,3.12
XTAL3225 [mm] "XTAL3225"
  rect 1x0.6 smd: 1(1.16,0.887) 2(-1.16,0.887) 3(-1.16,-0.913) 4(1.16,-0.913)
  silkscreen extent 0.63,0.57 1.75,1.31
ZY_UR-3X2 [mil]
  silkscreen extent -67,-40 90,65

## Part data
A1: library part ANT2.4G
C1 C2 C3 C4 C5 C11 C15 C16 C17 C18 C19 C20 C21 C22 C23 C24 C25 C26 C27 C28 C29 C30 C31 C32 C33 C34 C35 C36 C37 C38 C39 C40 C41 C42 C43 C44 C45 C46 C47 C48 C49 C50 C51 C52 C53 C54 C55 C56 C57 C58 C59 C60 C61 C62 C63 C64 C65 C66 C67 C68 C69 C70 C71 C72 C73 C74 C75: library part CAP, "普通小电容"
C6 C9: library part CAP, "GRM1555C1H100JA01D,500R07N100JV4"
C7 C14: library part CAP, "GRM1555C1H1R2CA01D,500R07N1R2CV4"
C8 C10: library part CAP, "GRM1555C1H2R0CA01D,500R07N2R0CV4"
C12 C13: library part CAP, "GRM1555C1H1R8CA01D"
D1: "普通二极管"
DS1: library part LED, "黄色0603发光二极管"
DS2: library part LED, "蓝色0603发光二极管"
DS3: library part LED, "红色0603发光二极管"
J1: "Molex TF 卡座"
J3: "RJ45不带网络变压器"
J4: library part MICRO_USB, "4固定脚microUSB座"
J5: library part MCX_IPEX
L1 L6: library part L0402, "LQG15HS2N7S02,MLG1005S2N7ST"
L2 L7: library part L0402, "LQG15HS10NJ02,MLG1005S10NJT,HI1005-1C10NJMT"
L3 L4 L5: library part L0402, "LQG15HS2N0S02"
L8 L9: library part L, "vls3012小电感"
P1: library part "Header 19", "Header, 19-Pin"
P2: "Header, 28-Pin"
P3: "Header, 4-Pin"
R1 R2 R3 R4 R5 R6 R7 R8 R9 R10 R11 R12 R13 R14 R15 R16 R17 R18 R19 R20 R21 R23 R24 R25 R26 R27 R28 R29 R30 R31 R32 R33 R34 R35 R36 R38 R39 R40 R41: library part RES, "普通电阻"
R22 R37: library part RES, "普通电阻1%精度"
RX0 TX0: library part TP, "Description"
U2: library part DDR2_x16_512Gb_2Gb, "128MB DDR2 Winbond"
U3: library part SPIFLASH_SOP8W, "16MB SPIFLASH"
U7: "2.93V复位芯片"
U8: library part 24LC08B
X1: library part XTAL3225, "贴片晶振"

## Via types
v1: diameter 16, hole 8, Top Layer to Bottom Layer, tented both sides, 447 vias
v2: diameter 59.06, hole 39.37, Top Layer to Bottom Layer, 2 vias
v3: diameter 118.11, hole 78.74, Top Layer to Bottom Layer, tented both sides, 2 vias
v4: diameter 98.43, hole 78.74, Top Layer to Bottom Layer, tented both sides, 1 vias

## Nets (pads, with @x,y where several pads share a name; then routed paths per layer and width w, separated by ;. In a path a pad name is that pad's centre, name@x,y a point inside that pad or via, vN(x,y) a via of type N, cw(c..) or ccw(c..) an arc to the next point about the centre after c; other vN are vias at no path point)
3.3V_RF: C2.1 C3.2 C4.1 C5.1 C11.1 C16.1 C17.1 C18.1 C19.1 C20.1 C21.1 L2.2 L7.1 R1.2 R12.2 R14.2 R32.1 U1.8 U1.14 U1.15 U1.149 U1.150 U1.154 U1.155 U7.3 | length 1179.7
  Top Layer w5: v1(579.35,1060.35) 592.02,1073.02 R12.2@610.32,1073.02 ; C20.1@796,1176.02 R14.2@796,1228
  Top Layer w7: U7.3@745.26,1161 795.64,1161 ; v1(872,1287) 883,1276 R32.1@883,1228 ; v1(897,835.55) v1(921.68,835.55) v1(941,816.23) 978.39,816.23 988.24,826.08 1014.08,826.08 1025.06,837.06 1025.06,885.02 v1(1024.95,885.13) U1.8@1000.32,885.13 ; U1.154@1040.68,1000.29 1040.68,996.64 1030.83,986.79 U1.155@1030.83,974.7 1030.83,954.17 v1(1036.3,948.7) 1077.79,948.7 1089.89,960.8 U1.149@1089.89,974.7 1089.89,986.93 1080.05,996.77 1080.05,1015.05 v1(1085,1020)
  Top Layer w10: C4.1@923,1082.02 C5.1@923,1132.02
  Top Layer w15: C19.1@683.5,808.02 724,808.02 C17.1@737,808.02 v1(764,808.02) R1.2@784,808.02 ; C2.1@744,870.02 v1(770,870.02) L2.2@796,870.02 ; C16.1@744,1073.02 C3.2@744,1020.02 L7.1@796,1020.02 C11.1@796,1077.01 ; R1.2@780.81,808.71 789.81,808.71 R1.2@790.5,808.02 C18.1@838,808.02 ; C11.1@796,1064.01 C21.1@796,1125.02 C20.1@796,1176.02 ; C4.1@923,1072.18 923,1060 v1(945.74,1037.26)
  other v1: 711,808.02 814,808.02 770,1020.02 744,1046 796,1046 923,1099 796,1100
3.3VD: C1.1 C41.2 C42.1 C43.1 C44.1 C45.1 C47.1 C48.1 C54.1 C55.1 C56.1 C66.2 C69.2 D1.A DS1.A DS2.A DS3.A J1.4 L9.1 P1.12 P2.25 R1.1 R5.2 R9.2 R11.2 R15.1 R16.1 R17.1 R18.1 R19.1 R20.1 R21.1 R23.1 R33.1 U1.23 U1.32 U1.38 U1.41 U1.53 U1.60 U1.117 U1.123 U1.124 U1.134 U1.146 U6.8 U6.10 U8.4 | length 3546.9
  Top Layer w4: C55.1@844,717.02 C55.1@850,717.02 ; 1148.94,515 U1.53@1148.94,559.35 ; U1.60@1217.84,533.76 1217.84,410.16 1353.86,274.14 1353.86,246.14 C42.1@1353.86,245.14 ; U1.134@1237.53,1000.29 1237.53,1014.53 1250,1027 v1(1250.16,1027.16)
  Top Layer w5: U1.53@1148.94,559.35 v1(1148.94,581.94) ; U1.124@1335.95,1000.29 1335.95,990.92 1345.8,981.07 U1.123@1345.8,974.7 ; L9.1@2464.5,767.28 2464.5,807.5 2475,818 R5.2@2540,818
  Top Layer w6: v1(908,737.49) U1.23@974.73,737.5 ; 1105.51,1050.49 1119.16,1036.84 1119.16,1000.55 U1.146@1119.42,1000.29 ; 1148.94,515 1148.94,325.06 v1(1169,305)
  Top Layer w7: U1.32@1000.32,648.91 v1(1022.09,648.91) ; 1105.51,1050.49 1089,1067 1089,1166.02 C56.1@1112,1189.02 ; v1@1250,1027 R33.1@1250,1086.02 ; U1.124@1335.95,1000.29 1335.95,1035 ; 1335.95,1044.97 1335.95,1035 ; C41.2@1362,1086.02 1335.95,1059.97 1335.95,1035 ; U1.117@1441.27,954.03 1441.27,965 ; v1(2204,1225) 2204.1,1224.9 U6.8@2204.1,1196.46
  Top Layer w10: R1.1@790.5,768.02 C1.1@790.5,717.02 C55.1@844,717.02 864.47,737.49 v1(908,737.49) ; U1.38@1000.32,589.86 v1(1000.33,559.34) U1.41@1030.83,559.35 ; 1441.27,965 v1(1441.27,1000.28) ; v1(1603,1139) C54.1@1628.98,1139 ; U8.4@1764.6,1148.63 v1(1787.63,1148.63) ; v1(2042,1162) C69.2@2065,1162 ; R9.2@2065,1260 R11.2@2065,1211 C69.2@2065,1162 ; U6.10@2176.54,1149.21 2137.68,1149.21 2126.68,1138.2 2088.8,1138.2 C69.2@2065,1162 ; v1(2314,859) R23.1@2314,886 ; R17.1@2383,239 R21.1@2383,289 ; R19.1@2471,239 R16.1@2471,289 R15.1@2471,340 ; v1(2920,432.68) 2963.18,432.68 ; DS1.A@2963.5,352 DS2.A@2963.5,480.95 DS3.A@2963.5,609.91
  Top Layer w15: D1.A@950,496 950,525 C47.1@931,544 984.99,544 v1(1000.33,559.34) ; v1(1169,305) C43.1@1186.86,287.14 ; C41.2@1362,1086.02 C48.1@1412,1086.02 1441.27,1056.75 v1(1441.27,1000.28) ; R18.1@2383,189 2383,117 P2.25@2450,50 ; R21.1@2383,289 2427,289 ; v1(2427,322) 2427,289 ; R16.1@2471,289 2427,289
  Top Layer w20: v1(1342,258) C42.1@1353.86,246.14 ; v1(2289.28,811.28) v1(2382,811.28) ; C66.2@2335,801 2368.36,767.64 2464.14,767.64 L9.1@2464.5,767.28 ; C44.1@2723,311.68 C45.1@2723,361.68 2762,400.68 v1(2762,432.68)
  Bottom Layer w15: v1(2762,432.68) v1(2920,432.68) J1.4@2955.59,432.68
  other v1: 790.5,742 1335.95,1023 1113.51,1042.49 1387,1086.02
5V: C30.1 C46.1 C64.2 C65.1 J2.1 J4.1 P2.28 U4.7 U4.8 U5.1 U5.4 U6.21 U6.26 | length 1704.2
  Top Layer w7: U6.21@2282.84,1003.54 2282.84,969.16 2306,946 2343,946 C30.1@2363,926 2411,974 2411,1041 2401.21,1050.79 U6.26@2369.46,1050.79
  Top Layer w10: U6.26@2369.46,1050.79 2393,1050.79 ; U4.8@2587.53,549.74 U4.7@2607.21,549.74 2619.11,549.74 v1(2646.37,577) C64.2@2646.37,602
  Top Layer w20: C30.1@2363,926 v1(2393,926) ; v1@2544.18,759.77 U5.1@2575.63,759.77 ; U5.4@2654.37,684.96 2687.96,684.96 C65.1@2734,731 ; C65.1@2731.96,728.96 C65.1@2734,731 ; P2.28@2750,50 v1(2835.91,50) v1(2835.91,73) J2.1@2835.91,97.83 ; v1(2835.91,694.09) v1(2835.91,727) J4.1@2835.91,761.83 2805.08,731 v1(2776,731) C65.1@2734,731
  Top Layer w30: C46.1@2738,157 2738,123 2750,111 P2.28@2750,50
  Bottom Layer w10: v1(2646.37,577) 2646.37,601.37 v1(2776,731)
  Bottom Layer w20: v1(2393,926) 2448,871 2448,854 v1(2542,760) 2716,760 2745,731 v1(2776,731)
A3.3V: C24.2 C67.2 R23.2 U6.32 | length 159.4
  Top Layer w10: C24.2@2265,926 v1(2290,926) R23.2@2320,926 ; U6.32@2369.46,1168.9 2440.1,1168.9 C67.2@2464,1145
  other v1: 2408,1168.9
AGND: C24.1 C30.2 C67.1 C73.1 C74.1 J6.2 R30.2 U6.20 U6.24 U6.28 | length 674.9
  Top Layer w5: R30.2@2216,926 2217.5,927.5 2222.83,927.5 2263.16,967.82 U6.20@2263.16,1003.54 ; C24.1@2269,886 2289,906 2343,906 C30.2@2363,886
  Top Layer w10: R30.2@2215.16,929.84 R30.2@2216,929 ; R30.2@2216,926 R30.2@2216,929 ; v1(2216,958) R30.2@2216,929 ; C24.1@2269,886 C24.1@2265,886 2259,886 2217.5,927.5 R30.2@2216,929 ; U6.24@2341.9,1003.54 v1(2362.63,1003.54) ; U6.28@2369.46,1090.16 2448.84,1090.16 C67.1@2464,1075 C67.1@2443.57,1075
  Top Layer w20: C30.2@2363,886 2387,886 C74.1@2423,886 ; C73.1@2484,1211 v1(2522,1211)
  Top Layer w40: v1(2797.2,1077.2) J6.2@2917.32,1077.2
  other v1: 2393,886 2841,1077.2 2407,1090.16
BIAS: C73.2 R7.1 U6.1 | length 157.1
  Top Layer w10: U6.1@2341.9,1196.46 2381,1196.46 2395.54,1211 C73.2@2444,1211 2444,1259.46 R7.1@2444,1260
CLK_N: U1.76 U2.K8 | length 579.5
  Top Layer w4: U1.76@1375.32,533.76 1375.32,518.95 1410.27,484 1567,484 v1(1576,475) ; U2.K8@1836.01,589.86 1836.2,589.86 v1(1851,575.06)
  Bottom Layer w4: v1(1576,475) 1585,484 1666,484 1679.94,484 1781,585.06 1841,585.06 v1(1851,575.06)
CLK_P: U1.77 U2.J8 | length 592
  Top Layer w4: U1.77@1385.17,559.35 1385.17,521.83 1414,493 1567,493 v1(1576,502) ; v1(1852.31,605.06) U2.J8@1867.5,589.86
  Bottom Layer w4: v1(1576,502) 1585,493 1666,493 1676.22,493 1777.27,594.06 1841.31,594.06 v1(1852.31,605.06)
CPURST_N: P1.9 R12.1 S1.1 U1.138 U7.2 | length 1906.1
  Top Layer w4: R12.1@650.32,1073.02 U7.2@650.32,1121.17 ; U1.138@1198.16,1000.29 1198.16,1256.16 v1(1206.86,1264.86) 1230,1288 1388,1288 P1.9@1450,1350
  Top Layer w5: U7.2@650.32,1121.17 U7.2@652.74,1123.6 v1(693.6,1123.6)
  Bottom Layer w4: S1.1@103,1047 135,1015 344,1015 425,1096 666,1096 v1(693.6,1123.6) 693.6,1146 822.8,1275.2 848.8,1275.2 889,1235 1177,1235 v1(1206.86,1264.86)
DDR_BA0: U1.100 U2.L2 | length 437.7
  Top Layer w4: U1.100@1415.68,786.71 1589.71,786.71 1638,835 1757,835 1804.51,787.49 U2.L2@1804.51,778.27
DDR_BA1: U1.99 U2.L3 | length 429.4
  Top Layer w4: U1.99@1441.27,776.87 1596.86,776.86 1646.28,826.28 1747.72,826.28 1786.89,787.11 1786.89,764.96 U2.L3@1804.51,747.34
DDR_BA2: U1.101 U2.L1 | length 398.5
  Top Layer w4: U1.101@1441.27,796.55 1582.55,796.55 1632,846 1768.84,846 U2.L1@1804.51,810.33
DDR_CASN: U1.75 U2.L7 | length 663
  Top Layer w4: U1.75@1365.48,559.35 1365.48,515.52 1413.5,467.5 1443.5,467.5 1464,447 1577,447 1601,471 1768,471 1820,523 1820,605.87 U2.L7@1804.51,621.35
DDR_CSN: U1.78 U2.L8 | length 497.8
  Top Layer w4: U1.78@1395.01,533.76 1603.25,533.75 1644,493 1761,493 1804.51,536.51 U2.L8@1804.51,589.86
DDR_IO_1V8: C22.1 C23.1 C25.1 C26.1 C27.1 C28.1 C29.1 C32.1 C33.1 C34.1 C35.1 C36.1 C39.1 C62.1 R2.2 U1.79 U1.98 U1.116 U1.125 U2.A1 U2.A9 U2.C1 U2.C3 U2.C7 U2.C9 U2.E1 U2.E9 U2.G1 U2.G3 U2.G7 U2.G9 U2.J1 U2.J9 U2.M9 U2.R1 | length 2278.6
  Top Layer w4: 1312,1027 1326.11,1012.89 U1.125@1326.11,974.7 ; v1(1397.23,767.02) U1.98@1415.68,767.02 1453.36,767.02 ; C32.1@1680.98,1135 C32.1@1684.98,1139 ; U2.C1@2056.48,810.33 2071.81,795 2104.14,795 U2.A1@2119.47,810.33
  Top Layer w5: 1453.36,767.02 1454.78,767.02 ; v1(1763,523) 1773.02,533.02 U2.M9@1773.02,558.36
  Top Layer w7: v1(1326.11,938.11) U1.125@1326.11,974.7 ; U1.116@1416,944.51 v1(1416,964) ; U1.79@1441.27,580.02 1457.99,580.01 1472,566 v1(1484,566) ; 1454.78,767.02 1613.02,767.02 1656,810 v1(1656,810.28) ; U2.J1@1867.5,810.33 v1(1867.5,836) ; v1(1912.8,639.06) U2.G7@1930.5,621.35 ; v1(1930.5,719.5) U2.G3@1930.5,747.34 ; U2.G1@1930.5,810.33 v1(1930.5,836) ; v1(1978,795) 1978.16,795 U2.E1@1993.49,810.33 ; v1(2040.6,637.23) U2.C7@2056.48,621.35 ; U2.C9@2056.48,558.54 U2.C9@2056.48,558.36 2072,573.88 v1(2072,574.06) ; U2.C3@2056.48,747.34 2076.76,727.06 v1(2077,727.06) ; C26.1@2119,434.36 2119.47,434.83 2119.47,470 ; 2119.47,460.83 2119.47,470 ; U2.A1@2119.47,810.33 U2.A1@2119.47,810.33 ; v1@2119.47,837 U2.A1@2119.47,810.33 ; v1(2119.47,839) C29.1@2119.47,910.53 ; U2.A9@2120.2,557.64 U2.A9@2119.47,558.36 ; C27.1@2198,678.86 v1(2198,654) C34.1@2198,628.14 C39.1@2198,577.43 v1(2198,552) 2161.06,552 2154.69,558.36 v1(2142,558.36) U2.A9@2119.47,558.36 ; C28.1@2198,731.8 v1(2167.37,762.43) U2.A1@2119.47,810.33 ; 2119.47,470 v1(2119.47,505) U2.A9@2119.47,558.36
  Top Layer w10: 1312,1027 C33.1@1312,1086.02 1289,1109.02 1289,1166.02 C62.1@1312,1189.02 ; v1@1656.33,810.33 U2.R1@1678.53,810.33 ; C35.1@1675,1227 1692,1227 1722,1197 1722,1147 1714,1139 1684.98,1139 C32.1@1680.98,1139 ; C22.1@1720,951.02 v1(1744,951.02) R2.2@1767,951.02 ; v1(1867.5,520.5) U2.J9@1867.5,558.36 ; C25.1@1896.5,454.5 v1(1930.5,488.5) U2.G9@1930.5,558.36 ; C23.1@1984.49,442.49 1993.49,451.49 v1(1993.49,495) U2.E9@1993.49,558.36 ; C27.1@2198,678.86 v1(2198,704) C28.1@2198,730
  Top Layer w15: v1(1680.98,1114) C32.1@1680.98,1135
  Top Layer w20: v1(1484,566) C36.1@1510,566
  Bottom Layer w10: v1(1680.98,1114) 1680.98,1014.05 v1(1744,951.02)
  other v1: 2198,603 2146.77,783.03 1326.11,957
DDR_MCKE: U1.103 U2.K2 | length 551.6
  Top Layer w4: U1.103@1441.27,816.24 1569.23,816.23 1632,879 1648,879 cw(c1655,879) 1662,879 ccw(c1669,879) 1676,879 cw(c1683,879) 1690,879 ccw(c1697,879) 1704,879 cw(c1711,879) 1718,879 ccw(c1725,879) 1732,879 cw(c1739,879) 1746,879 1793,879 1836.01,835.99 U2.K2@1836.01,778.83
DDR_MDQM0: U1.108 U2.F3 | length 857.5
  Top Layer w4: U1.108@1415.68,865.45 1533.45,865.45 1569.1,901.1 1569.1,938.64 1638.36,1007.9 1910.1,1007.9 1947.1,970.9 1947.1,762.23 U2.F3@1961.99,747.34
DDR_MDQM1: U1.64 U2.B3 | length 1406.3
  Top Layer w4: U1.64@1257.21,533.76 1257.21,432.16 1428.47,260.9 1922.9,260.9 2093,431 2093,530 2104,541 2104,731.32 U2.B3@2087.98,747.34
DDR_MDQS0: U1.113 U2.F7 | length 1124.1
  Top Layer w4: U1.113@1441.27,914.66 1453,914.66 ; 1462.66,914.66 1453,914.66 ; U2.F7@1961.99,621.35 v1(1961.99,640.06) ; v1(2060,848) 2060,955 1942,1073 1610,1073 1491,954 1491,942 1463.66,914.66 1453,914.66
  Bottom Layer w4: v1(1961.99,640.06) 2060,738.07 v1(2060,848)
DDR_MDQS1: U1.72 U2.B7 | length 1076
  Top Layer w4: U1.72@1335.95,533.76 1335.95,495.05 1429,402 1806,402 1914,510 1914,594.62 1903.79,604.83 1895.76,604.83 1885.03,615.57 1885.03,642.08 1903.94,661 2048.33,661 U2.B7@2087.98,621.35
DDR_MODT: U1.74 U2.K9 | length 611.5
  Top Layer w4: U1.74@1355.64,533.76 1355.64,507.9 1408.08,455.46 1437.42,455.46 1456.88,436 1582,436 1600,454 1774,454 1836.01,516.01 U2.K9@1836.01,558.36
DDR_RASN: U1.81 U2.K7 | length 502.7
  Top Layer w4: U1.81@1441.27,599.7 1580.3,599.7 1659.1,520.9 1696.9,520.9 1757.49,581.49 1757.49,596.55 1766.78,605.83 1778.78,605.83 1788.99,616.04 1788.99,632.04 1797,640.06 1817.31,640.06 U2.K7@1836.01,621.35
DDR_VREF: C22.2 C31.1 C37.1 R2.1 R3.2 U1.90 U1.104 U2.J2 | length 812.7
  Top Layer w4: U1.90@1415.68,688.28 1401.72,688.28 1382,708 1382,816.08 v1(1392,826.08) 1562.08,826.08 1647,911
  Top Layer w7: 1647.02,911.02 C22.2@1720,911.02 R2.1@1767,911.02 1795,911.02 R3.2@1814,911.02 v1(1838,911.02) C31.1@1861,911.02 ; 1848,808 1848,798.34 U2.J2@1867.5,778.83
  Top Layer w8: v1(1838,911.02) 1838,876 v1(1848,866) 1848,808
  other v1: 1697,911.02 1744,911.02
DDR_WEN: U1.102 U2.K3 | length 520.5
  Top Layer w4: U1.102@1415.68,806.39 1576.39,806.39 1627,857 1784,857 1820,821 1820,763.35 U2.K3@1836.01,747.34